# EAGLE board Order (EAGLE 9.5.1), part 1 of 2
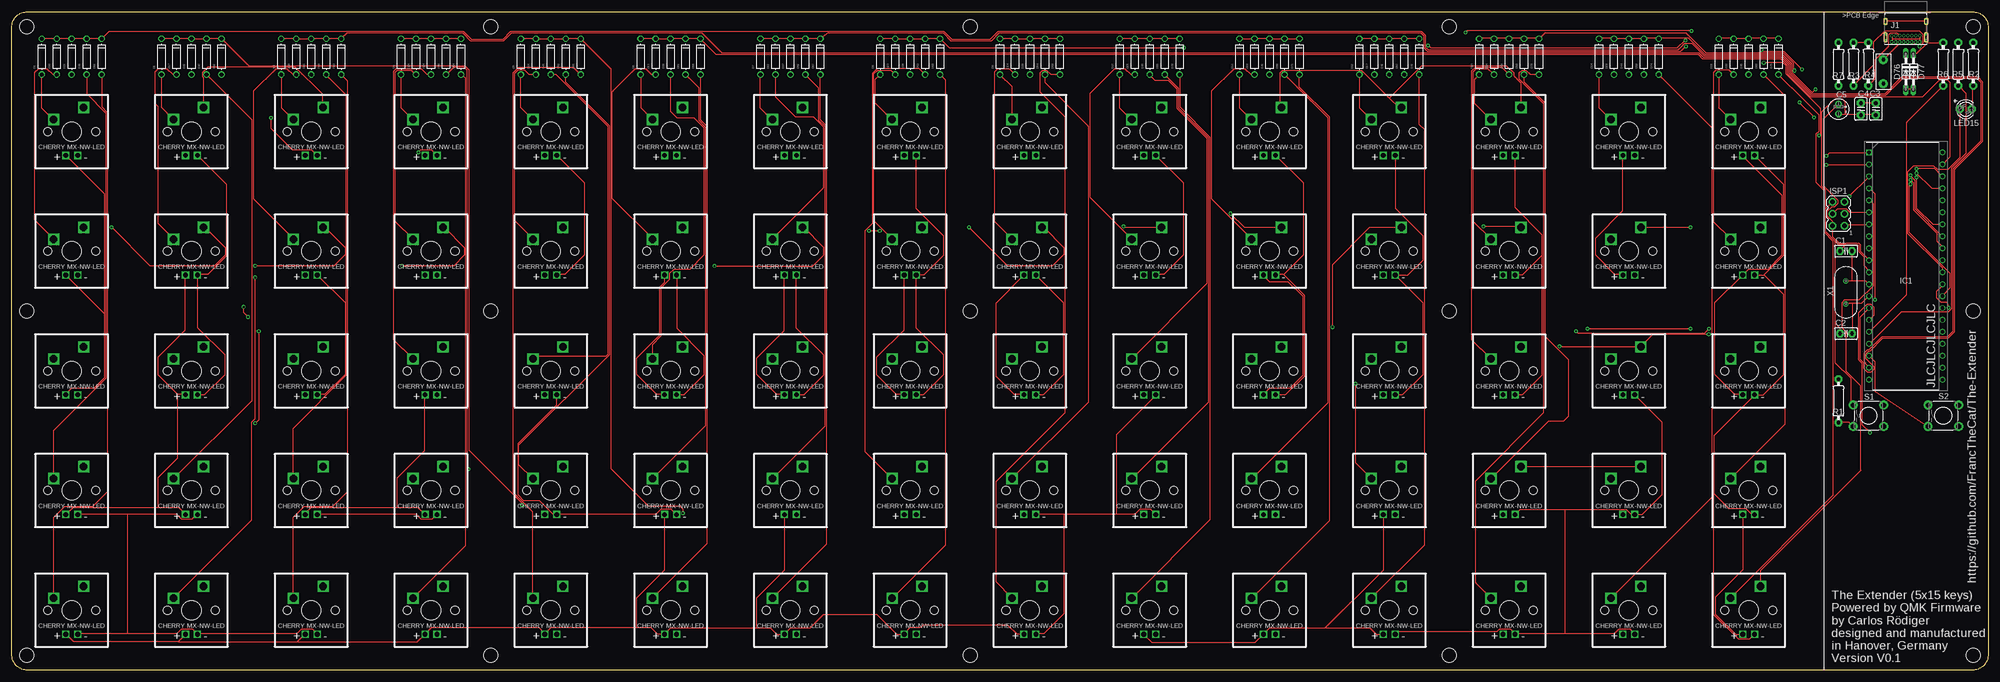
[diagram p0: board, top side]
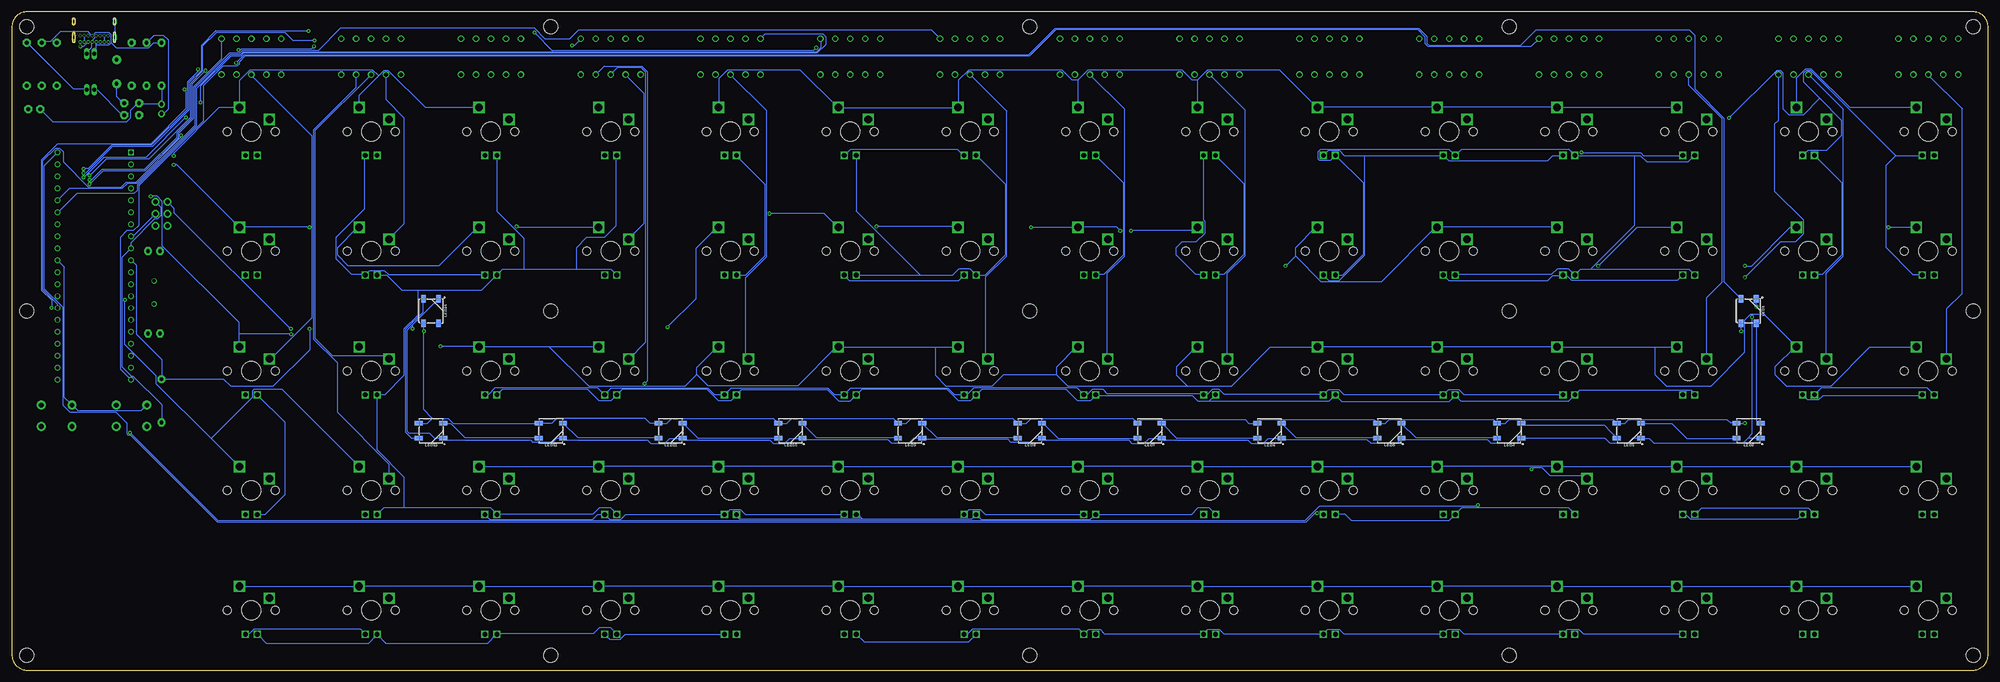
[diagram p1: board, bottom side, seen from below]

Size 419.1 x 139.7 mm. Coordinates in mm from the lower left corner, seen from the top.
Outline: 419.1,136.4 419.1,3.3 arc-90 415.8,0 3.3,0 arc-90 0,3.3 0,136.4 arc-90 3.3,139.7 415.8,139.7 arc-90 419.1,136.4
Copper layers (1*16): Top 0.035mm / dielectric 1.5mm / Bottom 0.035mm
Design rules "default *": minimum track width 6mil, minimum drill 0.35mm, track to track 6mil, track to pad 6mil, pad to pad 6mil, via to via 6mil, smd to smd 6mil, copper to edge 40mil, drill to drill 6mil, minimum pad ring 0mil, minimum via ring 8mil, stop-mask expansion 4mil, vias tented up to drill 0mil, thermal gap 10mil
Holes 3 mm at 3.18,3.18 3.18,136.53 415.93,3.18 415.93,136.53 203.2,3.18 203.2,136.53 101.6,3.18 101.6,136.53 304.8,3.18 304.8,136.53 3.18,76.2 101.6,76.2 203.2,76.2 304.8,76.2 415.93,76.2

## Footprints (pad centres in the part's own frame; a part is rotated, then mirrored left to right if it is on the bottom)
C025-025X050 = drill 0.813 pad 1.676 octagon: 1 -1.27,0; 2 1.27,0
E2-4 = drill 0.813 pad 1.422: + -1.016,0 | drill 0.813 pad 1.422 octagon: - 1.016,0
DO-1N4148 = drill 0.9: A -3.81,0; C 3.81,0
DO34Z7 = drill 0.813 long: A 3.81,0; C -3.81,0
PTH = drill 0.8 pad 1.88: P$1 -2.54,0; P$2 2.54,0
DIP1556W56P254L5232H483Q40N = drill 0.759 pad 1.159 square: 1 -7.779,24.13 | drill 0.759 pad 1.159: 2 -7.779,21.59; 3 -7.779,19.05; 4 -7.779,16.51; 5 -7.779,13.97; 6 -7.779,11.43; 7 -7.779,8.89; 8 -7.779,6.35; 9 -7.779,3.81; 10 -7.779,1.27; 11 -7.779,-1.27; 12 -7.779,-3.81; 13 -7.779,-6.35; 14 -7.779,-8.89; 15 -7.779,-11.43; 16 -7.779,-13.97; 17 -7.779,-16.51; 18 -7.779,-19.05; 19 -7.779,-21.59; 20 -7.779,-24.13; 21 7.779,-24.13; 22 7.779,-21.59; 23 7.779,-19.05; 24 7.779,-16.51; 25 7.779,-13.97; 26 7.779,-11.43; 27 7.779,-8.89; 28 7.779,-6.35; 29 7.779,-3.81; 30 7.779,-1.27; 31 7.779,1.27; 32 7.779,3.81; 33 7.779,6.35; 34 7.779,8.89; 35 7.779,11.43; 36 7.779,13.97; 37 7.779,16.51; 38 7.779,19.05; 39 7.779,21.59; 40 7.779,24.13
AVRISP = drill 0.9 pad 1.626: 1 -1.27,2.54; 2 1.27,2.54; 3 -1.27,0; 4 1.27,0; 5 -1.27,-2.54; 6 1.27,-2.54
GCT_USB4085-GF-A_REVA = drill 0.4 pad 0.65: A1 -2.975,4.025; A4 -2.125,4.025; A5 -1.275,4.025; A6 -0.425,4.025; A7 0.425,4.025; A8 1.275,4.025; A9 2.125,4.025; A12 2.975,4.025; B1 2.975,2.675; B4 2.125,2.675; B5 1.275,2.675; B6 0.425,2.675; B7 -0.425,2.675; B8 -1.275,2.675; B9 -2.125,2.675; B12 -2.975,2.675 | drill 0.6 long: P1 -4.325,3.045; P2 4.325,3.045; P3 4.325,-0.335; P4 -4.325,-0.335
WS2812B = smd 1.651 x 1: 1 2.577,-1.6; 2 2.577,1.6; 3 -2.577,1.6; 4 -2.577,-1.6
LED3MM = drill 0.813 pad 1.676 octagon: A -1.27,0; K 1.27,0
0207/9 = drill 0.813 pad 1.676 octagon: 1 -4.572,0; 2 4.572,0
TACTILE-PTH = drill 1.016 pad 1.88: 1 -3.251,2.261; 2 3.251,2.261; 3 -3.251,-2.261; 4 3.251,-2.261
CHERRYMX-NN-LED = drill 1 square: LED+ -1.27,-5.08; LED- 1.27,-5.08 | drill 1.6 square: SIDE -3.81,2.54; UP 2.54,5.08 | hole 1.753: -5.08,0; 5.08,0 | hole 4.089: 0,0
XTAL_HC49 = drill 0.65 pad 1.05: 1 -2.44,0; 2 2.44,0

## Placement (x,y rotation side)
C1  22p  [C025-025X050]  388.94,88.9 0 top
C2  22p  [C025-025X050]  388.94,71.44 0 top
C3  0.1u  [C025-025X050]  395.29,119.06 270 top
C4  0.1u  [C025-025X050]  392.11,119.06 270 top
C5  4.7u  [E2-4]  387.35,119.06 270 top
D1  [DO-1N4148]  6.35,130.18 90 top
D2  [DO-1N4148]  31.75,130.18 90 top
D3  [DO-1N4148]  57.15,130.18 90 top
D4  [DO-1N4148]  82.55,130.18 90 top
D5  [DO-1N4148]  107.95,130.18 90 top
D6  [DO-1N4148]  133.35,130.18 90 top
D7  [DO-1N4148]  158.75,130.18 90 top
D8  [DO-1N4148]  184.15,130.18 90 top
D9  [DO-1N4148]  209.55,130.18 90 top
D10  [DO-1N4148]  234.95,130.18 90 top
D11  [DO-1N4148]  260.35,130.18 90 top
D12  [DO-1N4148]  285.75,130.18 90 top
D13  [DO-1N4148]  311.15,130.18 90 top
D14  [DO-1N4148]  336.55,130.18 90 top
D15  [DO-1N4148]  361.95,130.18 90 top
D16  [DO-1N4148]  9.53,130.18 90 top
D17  [DO-1N4148]  34.93,130.18 90 top
D18  [DO-1N4148]  60.33,130.18 90 top
D19  [DO-1N4148]  85.72,130.18 90 top
D20  [DO-1N4148]  111.12,130.18 90 top
D21  [DO-1N4148]  136.53,130.18 90 top
D22  [DO-1N4148]  161.93,130.18 90 top
D23  [DO-1N4148]  187.33,130.18 90 top
D24  [DO-1N4148]  212.72,130.18 90 top
D25  [DO-1N4148]  238.12,130.18 90 top
D26  [DO-1N4148]  263.52,130.18 90 top
D27  [DO-1N4148]  288.93,130.18 90 top
D28  [DO-1N4148]  314.32,130.18 90 top
D29  [DO-1N4148]  339.73,130.18 90 top
D30  [DO-1N4148]  365.12,130.18 90 top
D31  [DO-1N4148]  12.7,130.18 90 top
D32  [DO-1N4148]  38.1,130.18 90 top
D33  [DO-1N4148]  63.5,130.18 90 top
D34  [DO-1N4148]  88.9,130.18 90 top
D35  [DO-1N4148]  114.3,130.18 90 top
D36  [DO-1N4148]  139.7,130.18 90 top
D37  [DO-1N4148]  165.1,130.18 90 top
D38  [DO-1N4148]  190.5,130.18 90 top
D39  [DO-1N4148]  215.9,130.18 90 top
D40  [DO-1N4148]  241.3,130.18 90 top
D41  [DO-1N4148]  266.7,130.18 90 top
D42  [DO-1N4148]  292.1,130.18 90 top
D43  [DO-1N4148]  317.5,130.18 90 top
D44  [DO-1N4148]  342.9,130.18 90 top
D45  [DO-1N4148]  368.3,130.18 90 top
D46  [DO-1N4148]  15.88,130.18 90 top
D47  [DO-1N4148]  41.28,130.18 90 top
D48  [DO-1N4148]  66.68,130.18 90 top
D49  [DO-1N4148]  92.08,130.18 90 top
D50  [DO-1N4148]  117.48,130.18 90 top
D51  [DO-1N4148]  142.88,130.18 90 top
D52  [DO-1N4148]  168.28,130.18 90 top
D53  [DO-1N4148]  193.68,130.18 90 top
D54  [DO-1N4148]  219.08,130.18 90 top
D55  [DO-1N4148]  244.47,130.18 90 top
D56  [DO-1N4148]  269.88,130.18 90 top
D57  [DO-1N4148]  295.27,130.18 90 top
D58  [DO-1N4148]  320.68,130.18 90 top
D59  [DO-1N4148]  346.08,130.18 90 top
D60  [DO-1N4148]  371.48,130.18 90 top
D61  [DO-1N4148]  19.05,130.18 90 top
D62  [DO-1N4148]  44.45,130.18 90 top
D63  [DO-1N4148]  69.85,130.18 90 top
D64  [DO-1N4148]  95.25,130.18 90 top
D65  [DO-1N4148]  120.65,130.18 90 top
D66  [DO-1N4148]  146.05,130.18 90 top
D67  [DO-1N4148]  171.45,130.18 90 top
D68  [DO-1N4148]  196.85,130.18 90 top
D69  [DO-1N4148]  222.25,130.18 90 top
D70  [DO-1N4148]  247.65,130.18 90 top
D71  [DO-1N4148]  273.05,130.18 90 top
D72  [DO-1N4148]  298.45,130.18 90 top
D73  [DO-1N4148]  323.85,130.18 90 top
D74  [DO-1N4148]  349.25,130.18 90 top
D75  [DO-1N4148]  374.65,130.18 90 top
D76  [DO34Z7]  401.64,127 270 top
D77  [DO34Z7]  403.23,127 270 top
F1  72V/0.25A  [PTH]  396.88,127 90 top
IC1  ATMEGA32A-PU  [DIP1556W56P254L5232H483Q40N]  401.64,85.72 0 top
ISP1  AVRISP-6  [AVRISP]  387.35,96.84 180 top
J1  USB4085-GF-A_REVA  [GCT_USB4085-GF-A_REVA]  401.64,137.32 180 top
LED1  WS2812B  [WS2812B]  50.8,76.2 270 bottom
LED2  WS2812B  [WS2812B]  50.8,50.8 180 bottom
LED3  WS2812B  [WS2812B]  76.2,50.8 180 bottom
LED4  WS2812B  [WS2812B]  101.6,50.8 180 bottom
LED5  WS2812B  [WS2812B]  127,50.8 180 bottom
LED6  WS2812B  [WS2812B]  152.4,50.8 180 bottom
LED7  WS2812B  [WS2812B]  177.8,50.8 180 bottom
LED8  WS2812B  [WS2812B]  203.2,50.8 180 bottom
LED9  WS2812B  [WS2812B]  228.6,50.8 180 bottom
LED10  WS2812B  [WS2812B]  254,50.8 180 bottom
LED11  WS2812B  [WS2812B]  279.4,50.8 180 bottom
LED12  WS2812B  [WS2812B]  304.8,50.8 180 bottom
LED13  WS2812B  [WS2812B]  330.2,50.8 180 bottom
LED14  WS2812B  [WS2812B]  330.2,76.2 270 bottom
LED15  [LED3MM]  414.34,119.06 0 top
R1  10k  [0207/9]  387.35,57.15 90 top
R2  1.5k  [0207/9]  415.93,128.59 90 top
R3  5.1k  [0207/9]  390.52,128.59 90 top
R4  5.1k  [0207/9]  393.7,128.59 90 top
R5  75R  [0207/9]  412.75,128.59 270 top
R6  75R  [0207/9]  409.58,128.59 270 top
R7  1.5k  [0207/9]  387.35,128.59 270 top
S1  [TACTILE-PTH]  393.7,53.97 0 top
S2  [TACTILE-PTH]  409.58,53.97 0 top
U$1  CHERRY-MX1A-E1NW-LED  [CHERRYMX-NN-LED]  12.7,114.3 0 top
U$2  CHERRY-MX1A-E1NW-LED  [CHERRYMX-NN-LED]  38.1,114.3 0 top
U$3  CHERRY-MX1A-E1NW-LED  [CHERRYMX-NN-LED]  63.5,114.3 0 top
U$4  CHERRY-MX1A-E1NW-LED  [CHERRYMX-NN-LED]  88.9,114.3 0 top
U$5  CHERRY-MX1A-E1NW-LED  [CHERRYMX-NN-LED]  114.3,114.3 0 top
U$6  CHERRY-MX1A-E1NW-LED  [CHERRYMX-NN-LED]  139.7,114.3 0 top
U$7  CHERRY-MX1A-E1NW-LED  [CHERRYMX-NN-LED]  165.1,114.3 0 top
U$8  CHERRY-MX1A-E1NW-LED  [CHERRYMX-NN-LED]  190.5,114.3 0 top
U$9  CHERRY-MX1A-E1NW-LED  [CHERRYMX-NN-LED]  215.9,114.3 0 top
U$10  CHERRY-MX1A-E1NW-LED  [CHERRYMX-NN-LED]  241.3,114.3 0 top
U$11  CHERRY-MX1A-E1NW-LED  [CHERRYMX-NN-LED]  266.7,114.3 0 top
U$12  CHERRY-MX1A-E1NW-LED  [CHERRYMX-NN-LED]  292.1,114.3 0 top
U$13  CHERRY-MX1A-E1NW-LED  [CHERRYMX-NN-LED]  317.5,114.3 0 top
U$14  CHERRY-MX1A-E1NW-LED  [CHERRYMX-NN-LED]  342.9,114.3 0 top
U$15  CHERRY-MX1A-E1NW-LED  [CHERRYMX-NN-LED]  368.3,114.3 0 top
U$16  CHERRY-MX1A-E1NW-LED  [CHERRYMX-NN-LED]  12.7,88.9 0 top
U$17  CHERRY-MX1A-E1NW-LED  [CHERRYMX-NN-LED]  38.1,88.9 0 top
U$18  CHERRY-MX1A-E1NW-LED  [CHERRYMX-NN-LED]  63.5,88.9 0 top
U$19  CHERRY-MX1A-E1NW-LED  [CHERRYMX-NN-LED]  88.9,88.9 0 top
U$20  CHERRY-MX1A-E1NW-LED  [CHERRYMX-NN-LED]  114.3,88.9 0 top
U$21  CHERRY-MX1A-E1NW-LED  [CHERRYMX-NN-LED]  139.7,88.9 0 top
U$22  CHERRY-MX1A-E1NW-LED  [CHERRYMX-NN-LED]  165.1,88.9 0 top
U$23  CHERRY-MX1A-E1NW-LED  [CHERRYMX-NN-LED]  190.5,88.9 0 top
U$24  CHERRY-MX1A-E1NW-LED  [CHERRYMX-NN-LED]  215.9,88.9 0 top
U$25  CHERRY-MX1A-E1NW-LED  [CHERRYMX-NN-LED]  241.3,88.9 0 top
U$26  CHERRY-MX1A-E1NW-LED  [CHERRYMX-NN-LED]  266.7,88.9 0 top
U$27  CHERRY-MX1A-E1NW-LED  [CHERRYMX-NN-LED]  292.1,88.9 0 top
U$28  CHERRY-MX1A-E1NW-LED  [CHERRYMX-NN-LED]  317.5,88.9 0 top
U$29  CHERRY-MX1A-E1NW-LED  [CHERRYMX-NN-LED]  342.9,88.9 0 top
U$30  CHERRY-MX1A-E1NW-LED  [CHERRYMX-NN-LED]  368.3,88.9 0 top
U$31  CHERRY-MX1A-E1NW-LED  [CHERRYMX-NN-LED]  12.7,63.5 0 top
U$32  CHERRY-MX1A-E1NW-LED  [CHERRYMX-NN-LED]  38.1,63.5 0 top
U$33  CHERRY-MX1A-E1NW-LED  [CHERRYMX-NN-LED]  63.5,63.5 0 top
U$34  CHERRY-MX1A-E1NW-LED  [CHERRYMX-NN-LED]  88.9,63.5 0 top
U$35  CHERRY-MX1A-E1NW-LED  [CHERRYMX-NN-LED]  114.3,63.5 0 top
U$36  CHERRY-MX1A-E1NW-LED  [CHERRYMX-NN-LED]  139.7,63.5 0 top
U$37  CHERRY-MX1A-E1NW-LED  [CHERRYMX-NN-LED]  165.1,63.5 0 top
U$38  CHERRY-MX1A-E1NW-LED  [CHERRYMX-NN-LED]  190.5,63.5 0 top
U$39  CHERRY-MX1A-E1NW-LED  [CHERRYMX-NN-LED]  215.9,63.5 0 top
U$40  CHERRY-MX1A-E1NW-LED  [CHERRYMX-NN-LED]  241.3,63.5 0 top
U$41  CHERRY-MX1A-E1NW-LED  [CHERRYMX-NN-LED]  266.7,63.5 0 top
U$42  CHERRY-MX1A-E1NW-LED  [CHERRYMX-NN-LED]  292.1,63.5 0 top
U$43  CHERRY-MX1A-E1NW-LED  [CHERRYMX-NN-LED]  317.5,63.5 0 top
U$44  CHERRY-MX1A-E1NW-LED  [CHERRYMX-NN-LED]  342.9,63.5 0 top
U$45  CHERRY-MX1A-E1NW-LED  [CHERRYMX-NN-LED]  368.3,63.5 0 top
U$46  CHERRY-MX1A-E1NW-LED  [CHERRYMX-NN-LED]  12.7,38.1 0 top
U$47  CHERRY-MX1A-E1NW-LED  [CHERRYMX-NN-LED]  38.1,38.1 0 top
U$48  CHERRY-MX1A-E1NW-LED  [CHERRYMX-NN-LED]  63.5,38.1 0 top
U$49  CHERRY-MX1A-E1NW-LED  [CHERRYMX-NN-LED]  88.9,38.1 0 top
U$50  CHERRY-MX1A-E1NW-LED  [CHERRYMX-NN-LED]  114.3,38.1 0 top
U$51  CHERRY-MX1A-E1NW-LED  [CHERRYMX-NN-LED]  139.7,38.1 0 top
U$52  CHERRY-MX1A-E1NW-LED  [CHERRYMX-NN-LED]  165.1,38.1 0 top
U$53  CHERRY-MX1A-E1NW-LED  [CHERRYMX-NN-LED]  190.5,38.1 0 top
U$54  CHERRY-MX1A-E1NW-LED  [CHERRYMX-NN-LED]  215.9,38.1 0 top
U$55  CHERRY-MX1A-E1NW-LED  [CHERRYMX-NN-LED]  241.3,38.1 0 top
U$56  CHERRY-MX1A-E1NW-LED  [CHERRYMX-NN-LED]  266.7,38.1 0 top
U$57  CHERRY-MX1A-E1NW-LED  [CHERRYMX-NN-LED]  292.1,38.1 0 top
U$58  CHERRY-MX1A-E1NW-LED  [CHERRYMX-NN-LED]  317.5,38.1 0 top
U$59  CHERRY-MX1A-E1NW-LED  [CHERRYMX-NN-LED]  342.9,38.1 0 top
U$60  CHERRY-MX1A-E1NW-LED  [CHERRYMX-NN-LED]  368.3,38.1 0 top
U$61  CHERRY-MX1A-E1NW-LED  [CHERRYMX-NN-LED]  12.7,12.7 0 top
U$62  CHERRY-MX1A-E1NW-LED  [CHERRYMX-NN-LED]  38.1,12.7 0 top
U$63  CHERRY-MX1A-E1NW-LED  [CHERRYMX-NN-LED]  63.5,12.7 0 top
U$64  CHERRY-MX1A-E1NW-LED  [CHERRYMX-NN-LED]  88.9,12.7 0 top
U$65  CHERRY-MX1A-E1NW-LED  [CHERRYMX-NN-LED]  114.3,12.7 0 top
U$66  CHERRY-MX1A-E1NW-LED  [CHERRYMX-NN-LED]  139.7,12.7 0 top
U$67  CHERRY-MX1A-E1NW-LED  [CHERRYMX-NN-LED]  165.1,12.7 0 top
U$68  CHERRY-MX1A-E1NW-LED  [CHERRYMX-NN-LED]  190.5,12.7 0 top
U$69  CHERRY-MX1A-E1NW-LED  [CHERRYMX-NN-LED]  215.9,12.7 0 top
U$70  CHERRY-MX1A-E1NW-LED  [CHERRYMX-NN-LED]  241.3,12.7 0 top
U$71  CHERRY-MX1A-E1NW-LED  [CHERRYMX-NN-LED]  266.7,12.7 0 top
U$72  CHERRY-MX1A-E1NW-LED  [CHERRYMX-NN-LED]  292.1,12.7 0 top
U$73  CHERRY-MX1A-E1NW-LED  [CHERRYMX-NN-LED]  317.5,12.7 0 top
U$74  CHERRY-MX1A-E1NW-LED  [CHERRYMX-NN-LED]  342.9,12.7 0 top
U$75  CHERRY-MX1A-E1NW-LED  [CHERRYMX-NN-LED]  368.3,12.7 0 top
X1  49S/18PF  [XTAL_HC49]  388.94,80.17 90 top

## Library data of the parts
C1-C5 D1-D75 ISP1 LED15 R1-R7 = adafruit
D76 D77 = diode
F1 = SparkFun-Fuses; PROD_ID: RES-08490
IC1 = ATMEGA32A-PU; DESCRIPTION: 8-bit Microcontrollers - MCU 32KB In-system Flash 2.7V - 5.5V; HEIGHT: 4.826mm; MANUFACTURER_NAME: Microchip; MANUFACTURER_PART_NUMBER: ATMEGA32A-PU; MOUSER_PART_NUMBER: 556-ATMEGA32A-PU; MOUSER_PRICE-STOCK: https://www.mouser.com/Search/Refine.aspx?Keyword=556-ATMEGA32A-PU
J1 = USB4085-GF-A_REVA; DESCRIPTION: CONN RCPT USB2.0 TYPEC 16POS; DIGI-KEY_PART_NUMBER: 2073-USB4085-GF-ACT-ND; DIGI-KEY_PURCHASE_URL: https://www.digikey.de/product-detail/en/gct/USB4085-GF-A/2073-USB4085-GF-ACT-ND/9859733?utm_source=snapeda&utm_medium=aggregator&utm_campaign=symbol; MF: Global Connector Technology; MP: USB4085-GF-A; PACKAGE: Package Analog Devices
LED1-LED14 = SparkFun-LED; PROD_ID: DIO-12503
S1 S2 = SparkFun-Retired
U$1-U$75 = my_parts
X1 = Crystals; CREATED_BY: PCBLayout.com; MANUFACTURER: Xinhunjing; MPN: 49S/18PF; PACKAGE: SMD

## Nets
5V: C3.1 C4.1 C5.+ F1.P$1 IC1.10 IC1.30 ISP1.2 LED1.3 LED2.3 LED3.3 LED4.3 LED5.3 LED6.3 LED7.3 LED8.3 LED9.3 LED10.3 LED11.3 LED12.3 LED13.3 LED14.3 LED15.A R1.2 R7.2
BOOT: IC1.18 S2.3
COLUMN0: D1.C D16.C D31.C D46.C D61.C IC1.14
COLUMN1: D2.C D17.C D32.C D47.C D62.C IC1.15
COLUMN2: D3.C D18.C D33.C D48.C D63.C IC1.19
COLUMN3: D4.C D19.C D34.C D49.C D64.C IC1.20
COLUMN4: D5.C D20.C D35.C D50.C D65.C IC1.40
COLUMN5: D6.C D21.C D36.C D51.C D66.C IC1.39
COLUMN6: D7.C D22.C D37.C D52.C D67.C IC1.38
COLUMN7: D8.C D23.C D38.C D53.C D68.C IC1.37
COLUMN8: D9.C D24.C D39.C D54.C D69.C IC1.36
COLUMN9: D10.C D25.C D40.C D55.C D70.C IC1.35
COLUMN10: D11.C D26.C D41.C D56.C D71.C IC1.34
COLUMN11: D12.C D27.C D42.C D57.C D72.C IC1.33
COLUMN12: D13.C D28.C D43.C D58.C D73.C IC1.32
COLUMN13: D14.C D29.C D44.C D59.C D74.C IC1.29
COLUMN14: D15.C D30.C D45.C D60.C D75.C IC1.28
GND: C1.1 C2.1 C3.2 C4.2 C5.- D76.A D77.A IC1.11 IC1.31 ISP1.6 LED1.1 LED2.1 LED3.1 LED4.1 LED5.1 LED6.1 LED7.1 LED8.1 LED9.1 LED10.1 LED11.1 LED12.1 LED13.1 LED14.1 R2.2 R3.2 R4.2 S1.1 S2.1
LED+: U$1.LED+ U$2.LED+ U$3.LED+ U$4.LED+ U$5.LED+ U$6.LED+ U$7.LED+ U$8.LED+ U$9.LED+ U$10.LED+ U$11.LED+ U$12.LED+ U$13.LED+ U$14.LED+ U$15.LED+ U$16.LED+ U$17.LED+ U$18.LED+ U$19.LED+ U$20.LED+ U$21.LED+ U$22.LED+ U$23.LED+ U$24.LED+ U$25.LED+ U$26.LED+ U$27.LED+ U$28.LED+ U$29.LED+ U$30.LED+ U$31.LED+ U$32.LED+ U$33.LED+ U$34.LED+ U$35.LED+ U$36.LED+ U$37.LED+ U$38.LED+ U$39.LED+ U$40.LED+ U$41.LED+ U$42.LED+ U$43.LED+ U$44.LED+ U$45.LED+ U$46.LED+ U$47.LED+ U$48.LED+ U$49.LED+ U$50.LED+ U$51.LED+ U$52.LED+ U$53.LED+ U$54.LED+ U$55.LED+ U$56.LED+ U$57.LED+ U$58.LED+ U$59.LED+ U$60.LED+ U$61.LED+ U$62.LED+ U$63.LED+ U$64.LED+ U$65.LED+ U$66.LED+ U$67.LED+ U$68.LED+ U$69.LED+ U$70.LED+ U$71.LED+ U$72.LED+ U$73.LED+ U$74.LED+ U$75.LED+
LED-: U$1.LED- U$2.LED- U$3.LED- U$4.LED- U$5.LED- U$6.LED- U$7.LED- U$8.LED- U$9.LED- U$10.LED- U$11.LED- U$12.LED- U$13.LED- U$14.LED- U$15.LED- U$16.LED- U$17.LED- U$18.LED- U$19.LED- U$20.LED- U$21.LED- U$22.LED- U$23.LED- U$24.LED- U$25.LED- U$26.LED- U$27.LED- U$28.LED- U$29.LED- U$30.LED- U$31.LED- U$32.LED- U$33.LED- U$34.LED- U$35.LED- U$36.LED- U$37.LED- U$38.LED- U$39.LED- U$40.LED- U$41.LED- U$42.LED- U$43.LED- U$44.LED- U$45.LED- U$46.LED- U$47.LED- U$48.LED- U$49.LED- U$50.LED- U$51.LED- U$53.LED- U$54.LED- U$55.LED- U$56.LED- U$57.LED- U$58.LED- U$59.LED- U$60.LED- U$61.LED- U$62.LED- U$63.LED- U$64.LED- U$65.LED- U$66.LED- U$67.LED- U$68.LED- U$69.LED- U$71.LED- U$72.LED- U$73.LED- U$74.LED- U$75.LED-
LED-\: U$70.LED-
MISO: IC1.7 ISP1.1
MOSI: IC1.6 ISP1.4
N$1: D1.A U$1.SIDE
N$2: D2.A U$2.SIDE
N$3: D3.A U$3.SIDE
N$4: D4.A U$4.SIDE
N$5: D5.A U$5.SIDE
N$6: D6.A U$6.SIDE
N$7: D7.A U$7.SIDE
N$8: D8.A U$8.SIDE
N$9: D9.A U$9.SIDE
N$10: D10.A U$10.SIDE
N$11: D11.A U$11.SIDE
N$12: D12.A U$12.SIDE
N$13: D13.A U$13.SIDE
N$14: D14.A U$14.SIDE
N$15: D15.A U$15.SIDE
N$16: D16.A U$16.SIDE
N$17: D17.A U$17.SIDE
N$18: D18.A U$18.SIDE
N$19: D19.A U$19.SIDE
N$20: D20.A U$20.SIDE
N$21: D21.A U$21.SIDE
N$22: D22.A U$22.SIDE
N$23: D23.A U$23.SIDE
N$24: D24.A U$24.SIDE
N$25: D25.A U$25.SIDE
N$26: D26.A U$26.SIDE
N$27: D27.A U$27.SIDE
N$28: D28.A U$28.SIDE
N$29: D29.A U$29.SIDE
N$30: D30.A U$30.SIDE
N$31: D31.A U$31.SIDE
N$32: D32.A U$32.SIDE
N$33: D33.A U$33.SIDE
N$34: D34.A U$34.SIDE
N$35: D35.A U$35.SIDE
N$36: D36.A U$36.SIDE
N$37: D37.A U$37.SIDE
N$38: D38.A U$38.SIDE
N$39: D39.A U$39.SIDE
N$40: D40.A U$40.SIDE
N$41: LED1.2 LED2.4
N$42: LED2.2 LED3.4
N$43: C1.2 IC1.12 X1.2
N$44: C2.2 IC1.13 X1.1
N$45: LED15.K R2.1
N$46: LED3.2 LED4.4
N$47: LED4.2 LED5.4
N$48: LED5.2 LED6.4
N$49: LED6.2 LED7.4
N$50: LED7.2 LED8.4
N$51: LED8.2 LED9.4
N$52: LED9.2 LED10.4
N$53: LED10.2 LED11.4
N$54: D41.A U$41.SIDE
N$55: D42.A U$42.SIDE
N$56: D43.A U$43.SIDE
N$57: D44.A U$44.SIDE
N$58: D45.A U$45.SIDE
N$59: D46.A U$46.SIDE
N$60: D47.A U$47.SIDE
N$61: D48.A U$48.SIDE
N$62: D49.A U$49.SIDE
N$63: D50.A U$50.SIDE
N$64: D51.A U$51.SIDE
N$65: D52.A U$52.SIDE
N$66: D53.A U$53.SIDE
N$67: D54.A U$54.SIDE
N$68: D55.A U$55.SIDE
N$69: D56.A U$56.SIDE
N$70: D57.A U$57.SIDE
N$71: D58.A U$58.SIDE
N$72: D59.A U$59.SIDE
N$73: D60.A U$60.SIDE
N$74: D61.A U$61.SIDE
N$75: D62.A U$62.SIDE
N$76: D63.A U$63.SIDE
N$77: D64.A U$64.SIDE
N$78: D65.A U$65.SIDE
N$79: D66.A U$66.SIDE
N$80: D67.A U$67.SIDE
N$81: D68.A U$68.SIDE
N$82: D69.A U$69.SIDE
N$83: D70.A U$70.SIDE
N$84: D71.A U$71.SIDE
N$85: D72.A U$72.SIDE
N$86: D73.A U$73.SIDE
N$87: D74.A U$74.SIDE
N$88: D75.A U$75.SIDE
N$89: LED11.2 LED12.4
N$90: LED12.2 LED13.4
N$91: LED13.2 LED14.4
N$92: J1.A1 J1.A12 J1.B1 J1.B12
N$93: F1.P$2 J1.A4 J1.A9 J1.B4 J1.B9
N$94: J1.P1 J1.P2 J1.P3 J1.P4
N$95: J1.A5 R3.1
N$96: D76.C J1.A7 J1.B7 R5.1 R7.1
N$97: D77.C J1.A6 J1.B6 R6.1
N$98: J1.B5 R4.1
N$119: U$52.LED-
RESET: IC1.9 ISP1.5 R1.1 S1.3
RGB_DATA: IC1.27 LED1.4
ROW0: IC1.1 U$1.UP U$2.UP U$3.UP U$4.UP U$5.UP U$6.UP U$7.UP U$8.UP U$9.UP U$10.UP U$11.UP U$12.UP U$13.UP U$14.UP U$15.UP
ROW1: IC1.2 U$16.UP U$17.UP U$18.UP U$19.UP U$20.UP U$21.UP U$22.UP U$23.UP U$24.UP U$25.UP U$26.UP U$27.UP U$28.UP U$29.UP U$30.UP
ROW2: IC1.3 U$31.UP U$32.UP U$33.UP U$34.UP U$35.UP U$36.UP U$37.UP U$38.UP U$39.UP U$40.UP U$41.UP U$42.UP U$43.UP U$44.UP U$45.UP
ROW3: IC1.4 U$46.UP U$47.UP U$48.UP U$49.UP U$50.UP U$51.UP U$52.UP U$53.UP U$54.UP U$55.UP U$56.UP U$57.UP U$58.UP U$59.UP U$60.UP
ROW4: IC1.5 U$61.UP U$62.UP U$63.UP U$64.UP U$65.UP U$66.UP U$67.UP U$68.UP U$69.UP U$70.UP U$71.UP U$72.UP U$73.UP U$74.UP U$75.UP
SCK: IC1.8 ISP1.3
USB_D+: IC1.16 R6.2
USB_D-: IC1.17 R5.2